# EAGLE board AOA-control-revC (EAGLE 7.0.0)
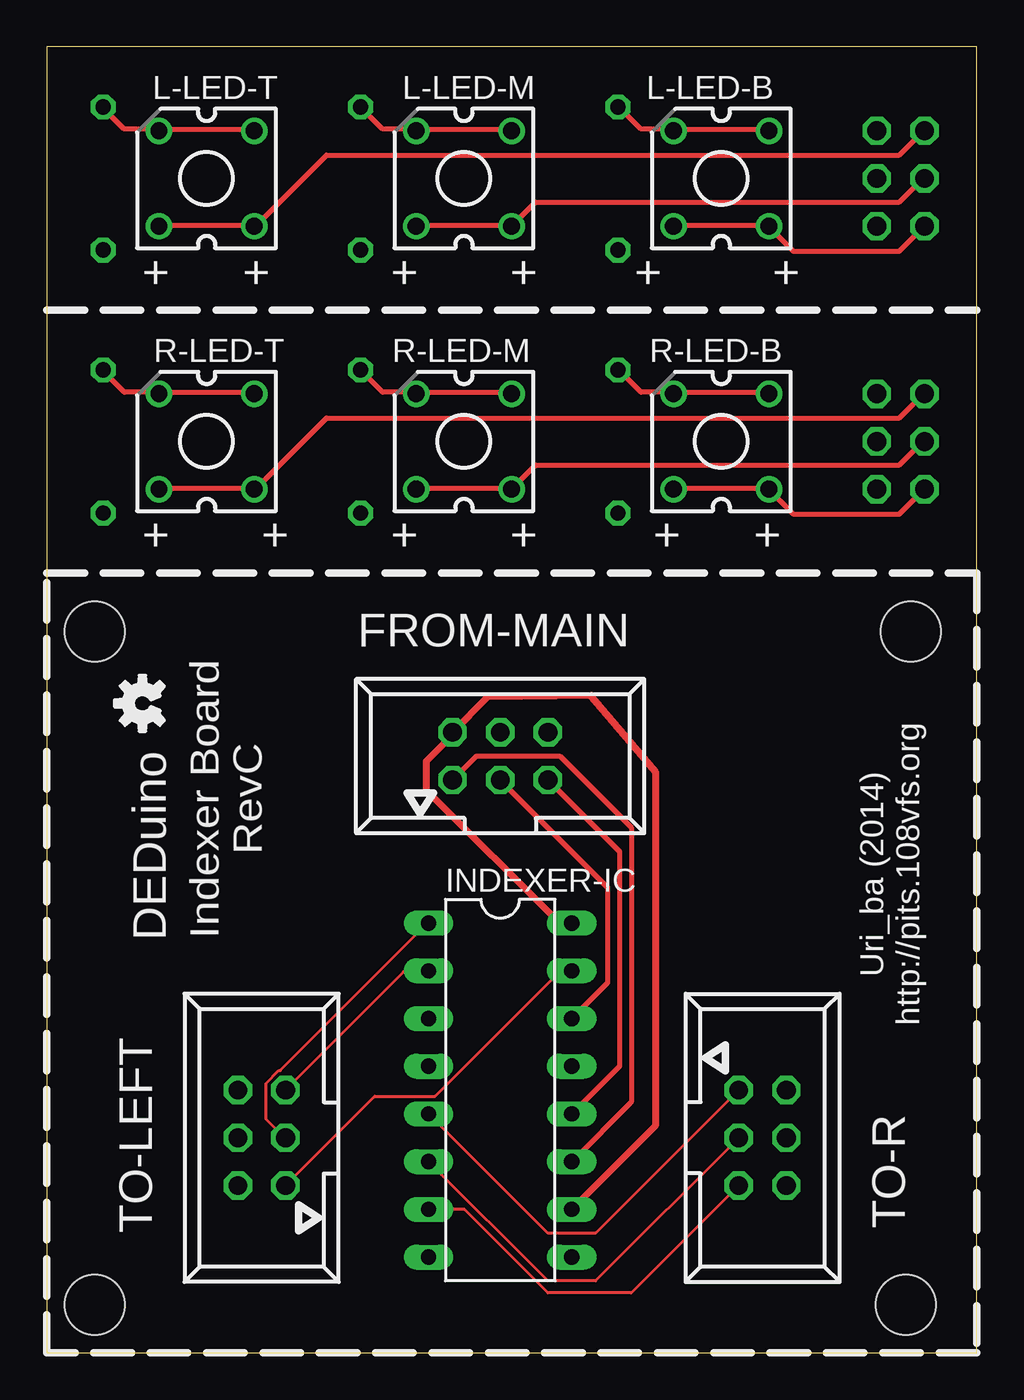
[diagram p0: board, top side]
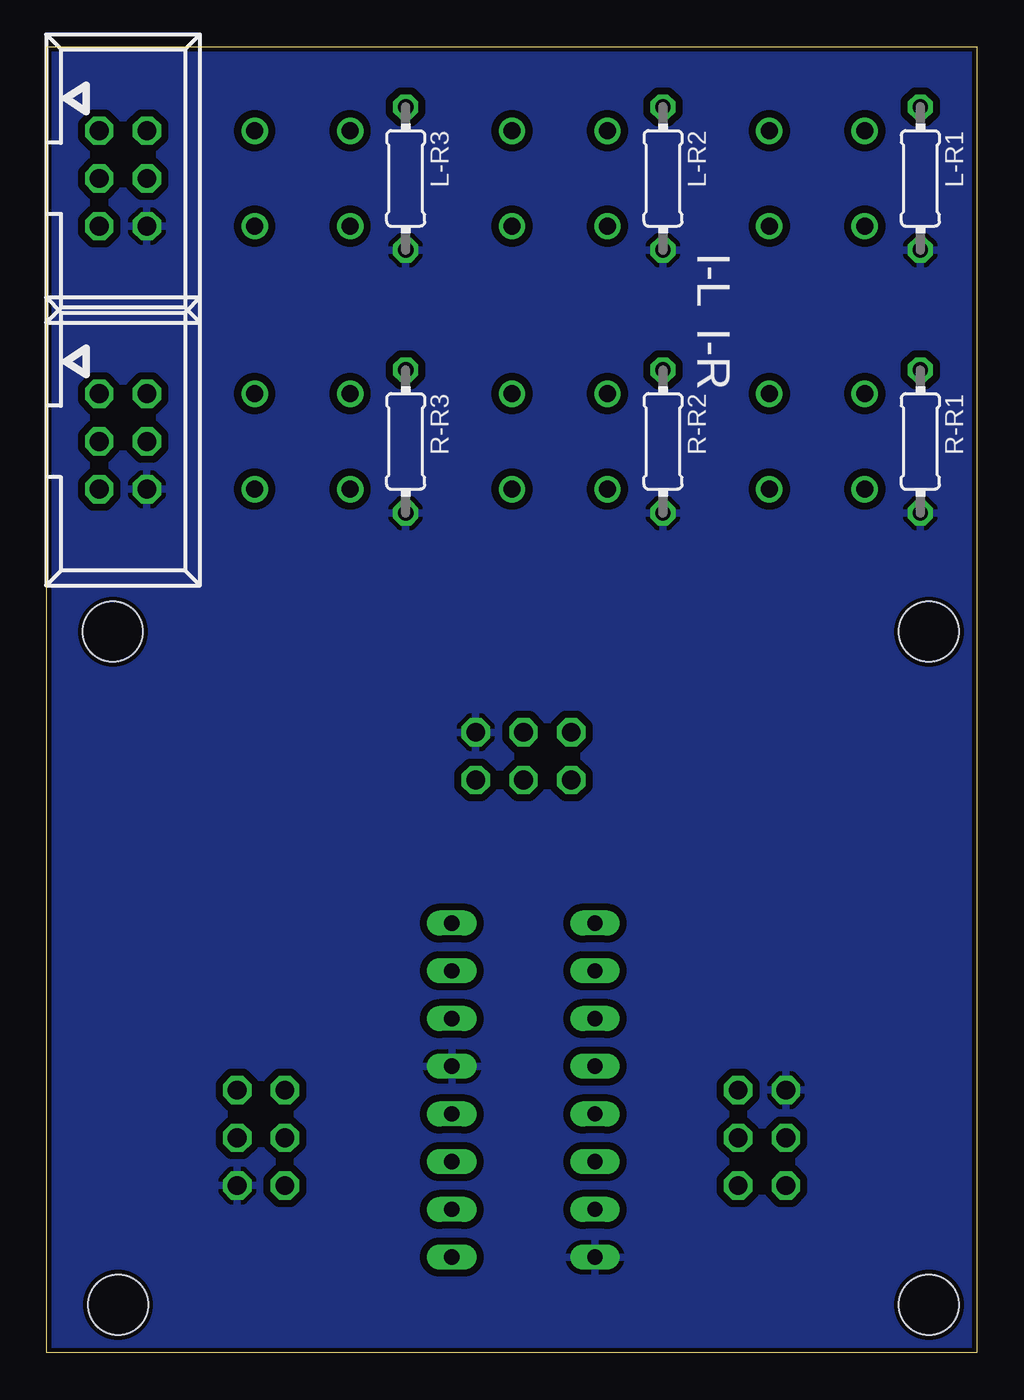
[diagram p1: board, bottom side, seen from below]

Size 49.5 x 69.5 mm. Coordinates in mm from the lower left corner, seen from the top.
Outline: 0,0 49.5,0 49.5,69.5 0,69.5 0,0
Copper layers (1*16): Top 0.035mm / dielectric 1.5mm / Bottom 0.035mm
Design rules "ITEADstudio_DRC": minimum track width 6mil, minimum drill 12mil, track to track 6mil, track to pad 6mil, pad to pad 6mil, via to via 6mil, smd to smd 0mil, copper to edge 10mil, drill to drill 10mil, minimum pad ring 10mil, minimum via ring 6mil, stop-mask expansion 2mil, vias tented up to drill 100mil, thermal gap 10mil
Net classes: 1 Signal: width 0.254 mm, drill 0.254 mm, clearance 0.254 mm; 2 Power: width 0.381 mm, drill 0.381 mm, clearance 0.381 mm
Holes 3.2 mm at 2.54,38.37 45.72,2.54 45.99,38.37 2.54,2.54

## Footprints (pad centres in the part's own frame; a part is rotated, then mirrored left to right if it is on the bottom)
057-006-1 = drill 1 octagon: 1 -2.54,-1.27; 2 -2.54,1.27; 3 0,-1.27; 4 0,1.27; 5 2.54,-1.27; 6 2.54,1.27
DIL16 = drill 0.813 long: 1 -8.89,-3.81; 2 -6.35,-3.81; 3 -3.81,-3.81; 4 -1.27,-3.81; 5 1.27,-3.81; 6 3.81,-3.81; 7 6.35,-3.81; 8 8.89,-3.81; 9 8.89,3.81; 10 6.35,3.81; 11 3.81,3.81; 12 1.27,3.81; 13 -1.27,3.81; 14 -3.81,3.81; 15 -6.35,3.81; 16 -8.89,3.81
CP41B = drill 0.9 pad 1.27: 1 -2.54,2.54; 2 -2.54,-2.54; 3 2.54,-2.54; 4 2.54,2.54
0204/7 = drill 0.813 octagon: 1 -3.81,0; 2 3.81,0

## Placement (x,y rotation side)
FROM-MAIN  057-006-1  [057-006-1]  24.13,31.75 0 top
I-L  057-006-1  [057-006-1]  45.45,62.5 270 bottom
I-R  057-006-1  [057-006-1]  45.45,48.5 270 bottom
INDEXER-IC  74HC595N  [DIL16]  24.13,13.97 270 top
L-LED-B  Yellow  [CP41B]  35.9,62.5 0 top
L-LED-M  Green  [CP41B]  22.2,62.5 0 top
L-LED-T  Red  [CP41B]  8.5,62.5 0 top
L-R1  220  [0204/7]  3,62.5 270 bottom
L-R2  220  [0204/7]  16.7,62.5 270 bottom
L-R3  220  [0204/7]  30.4,62.5 270 bottom
LOGO1  OSHW-LOGOS  [OSHW-LOGO-S]  5.08,34.56 90 top
R-LED-B  Red  [CP41B]  35.9,48.5 0 top
R-LED-M  Green  [CP41B]  22.2,48.5 0 top
R-LED-T  Blue  [CP41B]  8.5,48.5 0 top
R-R1  220  [0204/7]  3,48.5 270 bottom
R-R2  220  [0204/7]  16.7,48.5 270 bottom
R-R3  220  [0204/7]  30.4,48.5 270 bottom
TO-LEFT  057-006-1  [057-006-1]  11.43,11.43 90 top
TO-R  057-006-1  [057-006-1]  38.1,11.43 270 top

## Library data of the parts
FROM-MAIN I-L I-R TO-LEFT TO-R = con-panduit; OC_FARNELL: unknown; OC_NEWARK: unknown
INDEXER-IC = 74xx-eu
L-LED-B L-LED-M L-LED-T R-LED-B R-LED-M R-LED-T = led
L-R1-L-R3 R-R1-R-R3 = eagle-ltspice; SPICEMODEL: NONE; SPICEPREFIX: R
LOGO1 = SparkFun-Aesthetics

## Nets
+5V [Power]: FROM-MAIN.2 INDEXER-IC.10 INDEXER-IC.16
GND [Power]: FROM-MAIN.6 I-L.6 I-R.6 INDEXER-IC.8 INDEXER-IC.13 L-R1.2 L-R2.2 L-R3.2 R-R1.2 R-R2.2 R-R3.2 TO-LEFT.6 TO-R.6
INDEXER-LATCH [Signal]: FROM-MAIN.5 INDEXER-IC.12
L-B: INDEXER-IC.2 TO-LEFT.5
L-M: INDEXER-IC.1 TO-LEFT.3
L-T: INDEXER-IC.15 TO-LEFT.1
LIGHT_CLK [Signal]: FROM-MAIN.1 INDEXER-IC.11
LIGHT_DATA [Signal]: FROM-MAIN.3 INDEXER-IC.14
N$1 [Signal]: I-L.1 L-LED-T.2 L-LED-T.3
N$2 [Signal]: I-L.3 L-LED-M.2 L-LED-M.3
N$3 [Signal]: I-L.5 L-LED-B.2 L-LED-B.3
N$4 [Signal]: R-LED-B.1 R-LED-B.4 R-R3.1
N$5 [Signal]: I-R.1 R-LED-T.2 R-LED-T.3
N$6 [Signal]: I-R.3 R-LED-M.2 R-LED-M.3
N$7 [Signal]: I-R.5 R-LED-B.2 R-LED-B.3
N$8 [Signal]: L-LED-B.1 L-LED-B.4 L-R3.1
N$9 [Signal]: L-LED-M.1 L-LED-M.4 L-R2.1
N$10 [Signal]: L-LED-T.1 L-LED-T.4 L-R1.1
N$12 [Signal]: R-LED-M.1 R-LED-M.4 R-R2.1
N$13 [Signal]: R-LED-T.1 R-LED-T.4 R-R1.1
R-B: INDEXER-IC.7 TO-R.5
R-M: INDEXER-IC.6 TO-R.3
R-T: INDEXER-IC.5 TO-R.1

## Tracks (layer width: path | path; a pad name or v marks a point on that pad's centre or on a via)
+5V
  Top 0.381: INDEXER-IC.10 32.38,12.06 32.38,30.93 29,34.92 29,35 23.5,34.92 FROM-MAIN.2 21.57,32.84 20.19,31.47 20.19,29.95 27.28,22.86 INDEXER-IC.16
GND
  pour Bottom: 0,69.5 49.5,69.5 49.5,0 0,0
INDEXER-LATCH
  Top 0.254: INDEXER-IC.12 30.48,15.24 30.48,26.67 FROM-MAIN.5
L-B
  Top 0.152: INDEXER-IC.2 20.27,20.27 18.97,20.27 12.72,14.02 TO-LEFT.5
L-M
  Top 0.152: INDEXER-IC.1 20.27,22.86 12.42,15.01 12.34,15.01 11.66,14.33 11.66,12.42 12.65,11.43 TO-LEFT.3
L-T
  Top 0.152: TO-LEFT.1 17.45,13.64 20.65,13.64 27.28,20.27 27.89,20.27 INDEXER-IC.15
LIGHT_CLK
  Top 0.254: INDEXER-IC.11 31.11,13.34 31.11,27.94 27.3,31.75 22.86,31.75 FROM-MAIN.1
LIGHT_DATA
  Top 0.254: INDEXER-IC.14 29.84,19.68 29.84,24.77 FROM-MAIN.3
N$1
  Top 0.254: L-LED-T.2 6,60 11,60 L-LED-T.3 11.12,60 14.88,63.75 45.38,63.75 46.62,65 I-L.1
N$2
  Top 0.254: L-LED-M.2 19.75,60 24.62,60 L-LED-M.3 24.75,60 26,61.25 45.38,61.25 46.62,62.5 I-L.3
N$3
  Top 0.254: L-LED-B.2 33.38,60 38.38,60 L-LED-B.3 38.5,59.88 39.75,58.62 45.38,58.62 46.62,59.88 I-L.5
N$4
  Top 0.254: R-R3.1 30.5,52.25 31.62,51.12 33.25,51.12 R-LED-B.1 33.38,51.12 38.38,51.12 R-LED-B.4
N$5
  Top 0.254: R-LED-T.2 6,46 11,46 R-LED-T.3 11.12,46 14.88,49.75 45.38,49.75 46.62,51 I-R.1
N$6
  Top 0.254: R-LED-M.2 19.75,46 24.62,46 R-LED-M.3 24.75,46 26,47.25 45.38,47.25 46.62,48.5 I-R.3
N$7
  Top 0.254: R-LED-B.2 33.38,46 38.38,46 R-LED-B.3 38.5,45.88 39.75,44.62 45.38,44.62 46.62,45.88 I-R.5
N$8
  Top 0.254: L-R3.1 30.5,66.25 31.62,65.12 33.25,65.12 L-LED-B.1 33.38,65.12 38.38,65.12 L-LED-B.4
N$9
  Top 0.254: L-R2.1 16.75,66.25 17.88,65.12 19.62,65.12 L-LED-M.1 19.75,65.12 24.62,65.12 L-LED-M.4
N$10
  Top 0.254: L-R1.1 3,66.25 4.12,65.12 5.88,65.12 L-LED-T.1 6,65.12 11,65.12 L-LED-T.4
N$12
  Top 0.254: R-R2.1 16.75,52.25 17.88,51.12 19.62,51.12 R-LED-M.1 19.75,51.12 24.62,51.12 R-LED-M.4
N$13
  Top 0.254: R-R1.1 3,52.25 4.12,51.12 5.88,51.12 R-LED-T.1 6,51.12 11,51.12 R-LED-T.4
R-B
  Top 0.152: INDEXER-IC.7 22.23,7.62 26.67,3.17 31.11,3.17 TO-R.5
R-M
  Top 0.152: INDEXER-IC.6 26.67,3.81 29.21,3.81 TO-R.3
R-T
  Top 0.152: INDEXER-IC.5 26.67,6.35 29.21,6.35 TO-R.1

## Text on the board
tNames: + | + | + | + | + | + | + | + | + | + | + | + | DEDuino | Indexer Board / RevC | Uri_ba (2014) / http://pits.108vfs.org